# Allegro board ASIX_REV5.brd
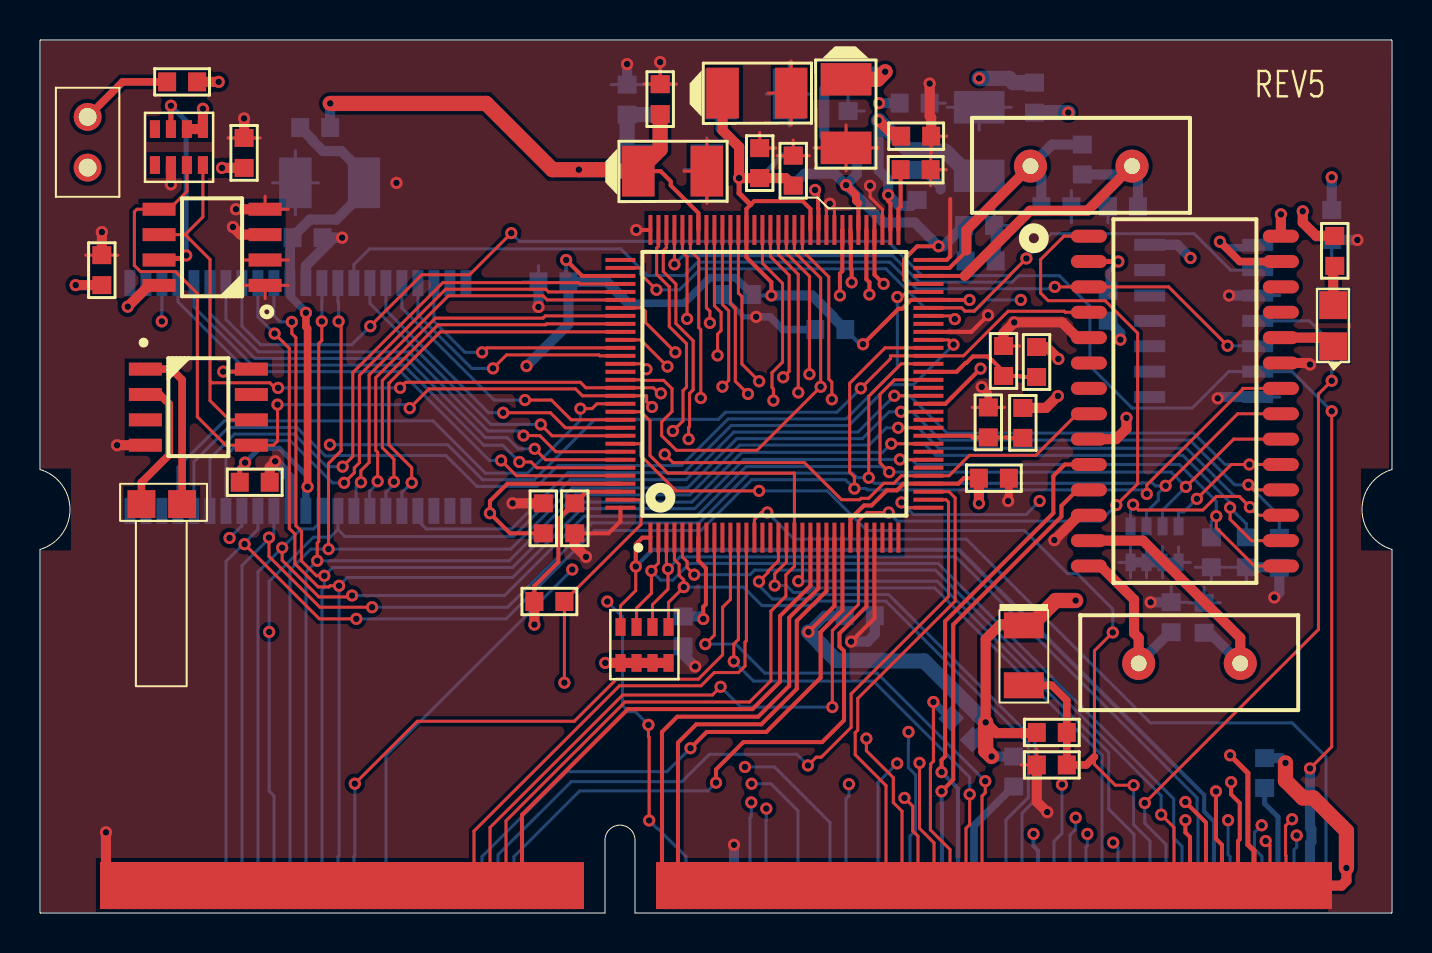
[diagram p0: board, top side]
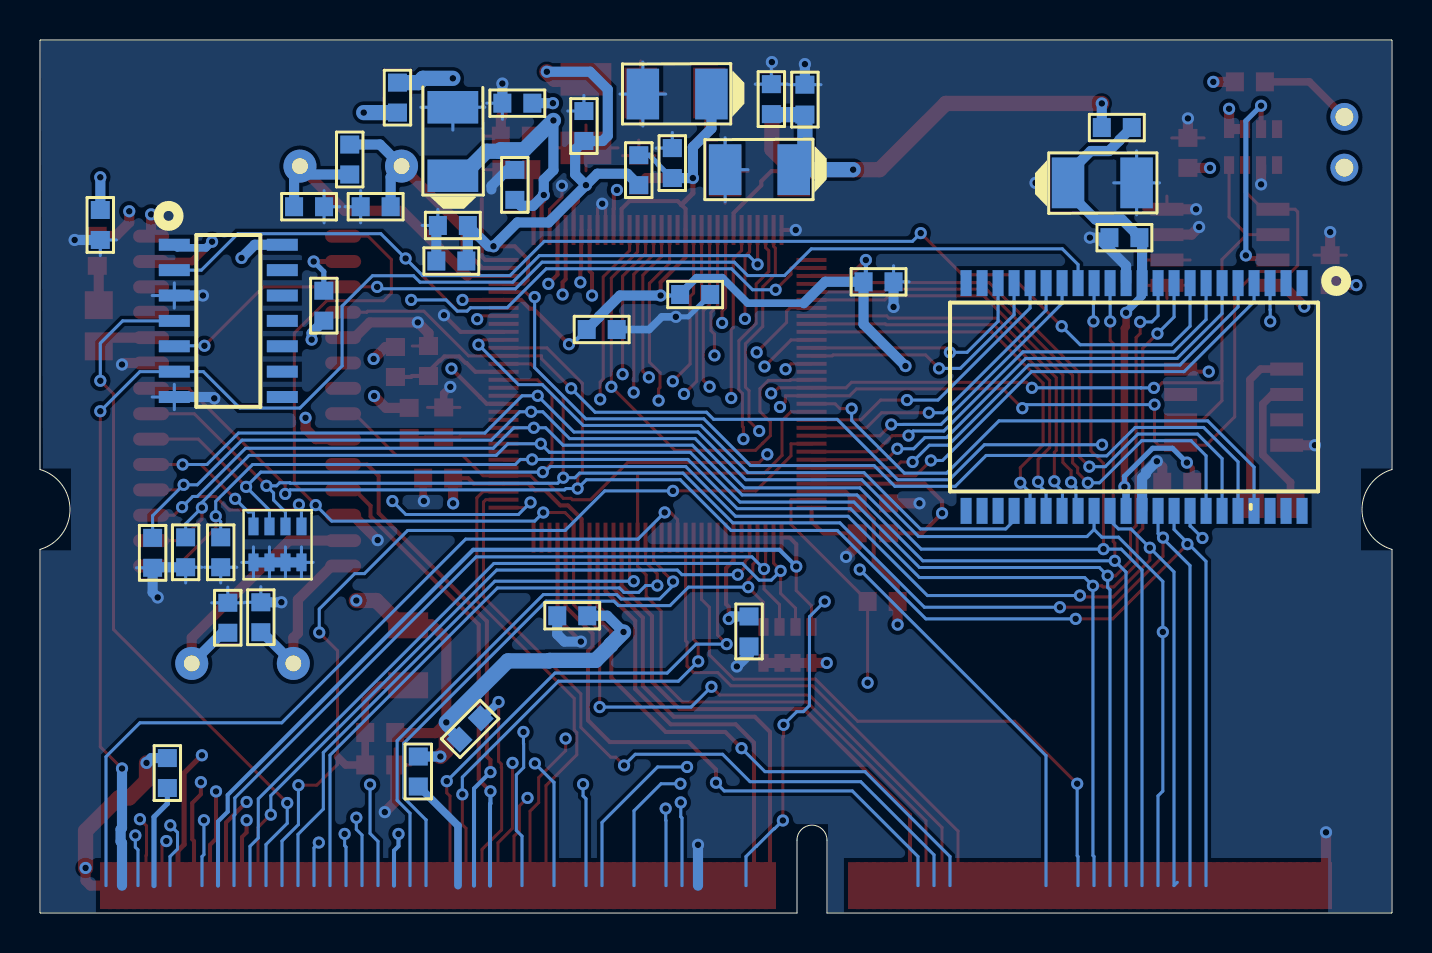
[diagram p1: board, bottom side, seen from below]

Outline 67.6 x 43.7 mm; copper layers: TOP, GND, POWER, BOTTOM. Coordinates in mm from the lower left corner of the outline.
Outline path: 0,43.67 0.03,43.7 67.57,43.7 67.6,43.67 67.6,22.2 arc(66.1,20.2) 67.6,18.2 67.6,0.03 67.57,0 29.75,0 29.75,3.65 arc(29,4.4) 28.25,3.65 28.25,0 0.03,0 0,0.03 0,18.2 arc(1.5,20.2) 0,22.2 0,43.67

## Design rules (mm)
net group CRYSTAL: nets 25MXTLN 25MXTLP
net group ETHERNET1: nets TXON TXOP
net group ETHERNET2: nets RXIN RXIP
net group USB_D: nets USB_D+ USB_D-
net group XDATA_BUS: nets XDATA0 XDATA1 XDATA2 XDATA3 XDATA4 XDATA5 XDATA6 XDATA7

## Placement (name value [footprint] x y rotation side)
C1  0.1UF_50V  [CAPC1608X55N_0603]  35.98 37.54 270 top
C2  10V 10UF  [SM_TANT]  37.46 40.99 180 bottom
C3  10V 10UF  [SM_TANT]  33.34 37.21 180 bottom
C4  0.1UF_50V  [CAPC1608X55N_0603]  31.03 40.74 270 bottom
C5  0.1UF_50V  [CAPC1608X55N_0603]  40.99 14.88 0 bottom
C6  0.1UF_50V  [CAPC1608X55N_0603]  35.98 37.54 90 bottom
C7  0.1UF_50V  [CAPC1608X55N_0603]  26.74 19.76 90 top
C8  10V 10UF  [SM_TANT]  33.34 37.13 180 top
C9  0.1UF_50V  [CAPC1608X55N_0603]  43.81 38.88 180 top
C10  10V 10UF  [SM_TANT]  46.96 40.33 270 bottom
C11  0.1UF_50V  [CAPC1608X55N_0603]  47.03 32.64 0 bottom
C12  0.1UF_50V  [CAPC1608X55N_0603]  32.15 14.09 90 bottom
C13  0.1UF_50V  [CAPC1608X55N_0603]  46.96 34.41 180 bottom
C14  10V 10UF  [SM_TANT]  40.3 38.3 90 top
C15  33pF  [CAPC1608X55N_0603]  54.15 35.35 0 bottom
C16  0.1UF_50V  [CAPC1608X55N_0603]  43.86 36.45 90 bottom
C17  10V 10UF  [SM_TANT]  37.56 41.04 180 top
C18  0.1UF_50V  [CAPC1608X55N_0603]  10.2 38.05 270 top
C19  0.1UF_50V  [CAPC1608X55N_0603]  47.69 21.76 0 top
C20  33pF  [CAPC1608X55N_0603]  50.82 35.35 180 bottom
C21  0.1UF_50V  [CAPC1608X55N_0603]  40.4 39.39 270 bottom
C22  0.1UF_50V  [CAPC1608X55N_0603]  37.66 37.16 270 top
C23  0.1UF_50V  [CAPC1608X55N_0603]  31.01 40.74 270 top
C24  1UF_50V  [CAPC1608X55N_0603]  50.59 7.41 0 top
C25  0.1UF_50V  [CAPC1608X55N_0603]  25.67 31.59 180 bottom
C26  0.1UF_50V  [CAPC1608X55N_0603]  3.09 32.18 90 top
C27  0.1UF_50V  [CAPC1608X55N_0603]  34.84 30.96 0 bottom
C28  0.1UF_50V  [CAPC1608X55N_0603]  29.36 40.71 90 bottom
C29  0.1UF_50V  [CAPC1608X55N_0603]  39.52 29.21 180 bottom
C30  0.1UF_50V  [CAPC1608X55N_0603]  25.16 19.76 90 top
C31  0.1UF_50V  [CAPC1608X55N_0603]  10.74 21.56 0 top
C32  0.1UF_50V  [CAPC1608X55N_0603]  13.38 33.8 180 bottom
C33  10V 10UF  [SM_TANT]  12.77 36.55 0 bottom
C34  0.1UF_50V  [CAPC1608X55N_0603]  64.59 34.44 270 bottom
C35  0.1UF_50V  [CAPC1608X55N_0603]  53.41 30.4 270 bottom
C36  15pF  [CAPC1608X55N_0603]  56.56 14.8 90 bottom
C37  15pF  [CAPC1608X55N_0603]  58.21 14.78 90 bottom
C38  0.1UF_50V  [CAPC1608X55N_0603]  43.73 40.54 0 bottom
D1  1N4148  [CAPC3216X130AN_1206]  49.19 12.9 90 top
D2  WHITE  [LED_SMT]  64.66 30.43 90 top
J1  -  [CON2]  2.38 38.58 90 top
L1  0.3A 10R  [CAPC1608X55N_0603]  49.73 40.81 90 bottom
L2  0.3A 10R  [CAPC1608X55N_0603]  37.66 37.18 270 bottom
L3  0.3A 10R  [CAPC1608X55N_0603]  13.76 39.32 0 bottom
R1  1M_5%  [CAPC1608X55N_0603]  52.11 37.72 270 bottom
R2  12.1K-1%  [CAPC1608X55N_0603]  43.78 37.21 0 top
R3  RPACK4_10K-1%  [SM_R_1608_NET4]  8.15 39.24 270 top
R4  10k  [CAPC1608X55N_0603]  46.09 9.22 135 bottom
R5  100K_5%  [CAPC1608X55N_0603]  50.59 9.04 0 top
R6  10K  [CAPC1608X55N_0603]  61.23 7.01 90 bottom
R7  10K  [CAPC1608X55N_0603]  48.68 7.08 90 bottom
R8  RPACK_4.7K  [SM_R_1608_NET4]  29.03 12.52 90 top
R9  4.7K_5%  [CAPC1608X55N_0603]  49.14 24.53 90 top
R10  4.7K_5%  [CAPC1608X55N_0603]  49.83 27.58 90 top
R11  4.7K_5%  [CAPC1608X55N_0603]  48.18 27.63 90 top
R12  4.7K_5%  [CAPC1608X55N_0603]  47.41 24.56 90 top
R13  4.7K_5%  [CAPC1608X55N_0603]  60.32 18.06 270 bottom
R14  4.7K_5%  [CAPC1608X55N_0603]  58.57 18.06 270 bottom
R15  RPACK_4.7K  [SM_R_1608_NET4]  54.53 19.35 270 bottom
R16  4.7K_5%  [CAPC1608X55N_0603]  61.97 18.03 270 bottom
R17  4.7K_5%  [CAPC1608X55N_0603]  7.11 41.6 0 top
R18  200  [CAPC1608X55N_0603]  64.74 33.14 90 top
R19  10k_1%  [CAPC1608X55N_0603]  25.47 15.59 0 top
U1  SN74HC02  [SOIC127P600X145-14N]  58.18 29.64 180 bottom
U2  AX11015  [QFP40P1600X1600X160-128N]  36.72 26.49 90 top
U3  AT24C02N/SO8  [SOIC127P594X363-8N]  8.6 33.32 180 top
U4  8563T  [SOIC127P594X363-8N]  7.92 25.32 0 top
U5  IS61LV5128AL  [SOP80P1176X120-44N]  12.9 25.83 270 bottom
U6  CH375B  [SOIC127P1047X264-28N]  57.24 25.63 0 top
U7  CON144  [DIMM_144]  29 0.2 0 top
X1  OSC 12 MHz  [XTAL1]  54.93 12.49 180 top
Y1  25M  [XTAL1]  49.52 37.39 180 top
Y2  32.768KHZ  [XTAL_32768]  7.11 20.47 180 top

## Library data of the parts
C1 C4-C7 C9 C11-C13 C15 C16 C18-C32 C34-C38 = C
C2 C3 C8 C10 C14 C17 C33 = CAP
D1 = D1N4001_1
D2 = LED
J1 = CON2
L1-L3 = INDUCTOR
R1 R2 R9-R14 R16 R17 = R_0
R3 = R_1
R4 R5 R19 = R_2
R6 R7 R18 = R
R8 R15 = RESISTOR DIP 4_1
U1 = SN7402_0
U2 = AT89C52/LCC_23
U3 = AT24C02N/SO8_0
U4 = 8563T_0
U5 = HM628128BLT_3
U6 = FT232BM_1
U7 = CON144
X1 = Oscillator_0
Y1 Y2 = CRYSTAL

## Footprints (pads in the part's own frame, mm; a bottom-side part is the same pattern mirrored in y, then rotated)
CAPC1608X55N_0603
  rect 0.9x0.95 smd: 1(-0.75,0) 2(0.75,0)
CAPC3216X130AN_1206
  rect 1.3x2 smd: 1(-1.5,0) 2(1.5,0)
CON2
  round 1.397 hole 0.889: 1(-1.27,0) 2(1.27,0)
DIMM_144
  rect 0.6x2.35 smd: A1(-25.7,1.175) A2(-24.9,1.175) A3(-24.1,1.175) A4(-23.3,1.175) A5(-22.5,1.175) A6(-21.7,1.175) A7(-20.9,1.175) A8(-20.1,1.175) A9(-19.3,1.175) A10(-18.5,1.175) A11(-17.7,1.175) A12(-16.9,1.175) A13(-16.1,1.175) A14(-15.3,1.175) A15(-14.5,1.175) A16(-13.7,1.175) A17(-12.9,1.175) A18(-12.1,1.175) A19(-11.3,1.175) A20(-10.5,1.175) A21(-9.7,1.175) A22(-8.9,1.175) A23(-8.1,1.175) A24(-7.3,1.175) A25(-6.5,1.175) A26(-5.7,1.175) A27(-4.9,1.175) A28(-4.1,1.175) A29(-3.3,1.175) A30(-2.5,1.175) A31(2.1,1.175) A32(2.9,1.175) A33(3.7,1.175) A34(4.5,1.175) A35(5.3,1.175) A36(6.1,1.175) A37(6.9,1.175) A38(7.7,1.175) A39(8.5,1.175) A40(9.3,1.175) A41(10.1,1.175) A42(10.9,1.175) A43(11.7,1.175) A44(12.5,1.175) A45(13.3,1.175) A46(14.1,1.175) A47(14.9,1.175) A48(15.7,1.175) A49(16.5,1.175) A50(17.3,1.175) A51(18.1,1.175) A52(18.9,1.175) A53(19.7,1.175) A54(20.5,1.175) A55(21.3,1.175) A56(22.1,1.175) A57(22.9,1.175) A58(23.7,1.175) A59(24.5,1.175) A60(25.3,1.175) A61(26.1,1.175) A62(26.9,1.175) A63(27.7,1.175) A64(28.5,1.175) A65(29.3,1.175) A66(30.1,1.175) A67(30.9,1.175) A68(31.7,1.175) A69(32.5,1.175) A70(33.3,1.175) A71(34.1,1.175) A72(34.9,1.175) B1(-25.3,1.175) B2(-24.5,1.175) B3(-23.7,1.175) B4(-22.9,1.175) B5(-22.1,1.175) B6(-21.3,1.175) B7(-20.5,1.175) B8(-19.7,1.175) B9(-18.9,1.175) B10(-18.1,1.175) B11(-17.3,1.175) B12(-16.5,1.175) B13(-15.7,1.175) B14(-14.9,1.175) B15(-14.1,1.175) B16(-13.3,1.175) B17(-12.5,1.175) B18(-11.7,1.175) B19(-10.9,1.175) B20(-10.1,1.175) B21(-9.3,1.175) B22(-8.5,1.175) B23(-7.7,1.175) B24(-6.9,1.175) B25(-6.1,1.175) B26(-5.3,1.175) B27(-4.5,1.175) B28(-3.7,1.175) B29(-2.9,1.175) B30(-2.1,1.175) B31(2.5,1.175) B32(3.3,1.175) B33(4.1,1.175) B34(4.9,1.175) B35(5.7,1.175) B36(6.5,1.175) B37(7.3,1.175) B38(8.1,1.175) B39(8.9,1.175) B40(9.7,1.175) B41(10.5,1.175) B42(11.3,1.175) B43(12.1,1.175) B44(12.9,1.175) B45(13.7,1.175) B46(14.5,1.175) B47(15.3,1.175) B48(16.1,1.175) B49(16.9,1.175) B50(17.7,1.175) B51(18.5,1.175) B52(19.3,1.175) B53(20.1,1.175) B54(20.9,1.175) B55(21.7,1.175) B56(22.5,1.175) B57(23.3,1.175) B58(24.1,1.175) B59(24.9,1.175) B60(25.7,1.175) B61(26.5,1.175) B62(27.3,1.175) B63(28.1,1.175) B64(28.9,1.175) B65(29.7,1.175) B66(30.5,1.175) B67(31.3,1.175) B68(32.1,1.175) B69(32.9,1.175) B70(33.7,1.175) B71(34.5,1.175) B72(35.3,1.175)
LED_SMT
  rect 1.397x1.397 smd: 1(0,0) 2(-2.06,0)
QFP40P1600X1600X160-128N
  rect 1.5x0.2 smd: 1(-7.7,6.2) 2(-7.7,5.8) 3(-7.7,5.4) 4(-7.7,5) 5(-7.7,4.6) 6(-7.7,4.2) 7(-7.7,3.8) 8(-7.7,3.4) 9(-7.7,3) 10(-7.7,2.6) 11(-7.7,2.2) 12(-7.7,1.8) 13(-7.7,1.4) 14(-7.7,1) 15(-7.7,0.6) 16(-7.7,0.2) 17(-7.7,-0.2) 18(-7.7,-0.6) 19(-7.7,-1) 20(-7.7,-1.4) 21(-7.7,-1.8) 22(-7.7,-2.2) 23(-7.7,-2.6) 24(-7.7,-3) 25(-7.7,-3.4) 26(-7.7,-3.8) 27(-7.7,-4.2) 28(-7.7,-4.6) 29(-7.7,-5) 30(-7.7,-5.4) 31(-7.7,-5.8) 32(-7.7,-6.2) 65(7.7,-6.2) 66(7.7,-5.8) 67(7.7,-5.4) 68(7.7,-5) 69(7.7,-4.6) 70(7.7,-4.2) 71(7.7,-3.8) 72(7.7,-3.4) 73(7.7,-3) 74(7.7,-2.6) 75(7.7,-2.2) 76(7.7,-1.8) 77(7.7,-1.4) 78(7.7,-1) 79(7.7,-0.6) 80(7.7,-0.2) 81(7.7,0.2) 82(7.7,0.6) 83(7.7,1) 84(7.7,1.4) 85(7.7,1.8) 86(7.7,2.2) 87(7.7,2.6) 88(7.7,3) 89(7.7,3.4) 90(7.7,3.8) 91(7.7,4.2) 92(7.7,4.6) 93(7.7,5) 94(7.7,5.4) 95(7.7,5.8) 96(7.7,6.2)
  rect 0.2x1.5 smd: 33(-6.2,-7.7) 34(-5.8,-7.7) 35(-5.4,-7.7) 36(-5,-7.7) 37(-4.6,-7.7) 38(-4.2,-7.7) 39(-3.8,-7.7) 40(-3.4,-7.7) 41(-3,-7.7) 42(-2.6,-7.7) 43(-2.2,-7.7) 44(-1.8,-7.7) 45(-1.4,-7.7) 46(-1,-7.7) 47(-0.6,-7.7) 48(-0.2,-7.7) 49(0.2,-7.7) 50(0.6,-7.7) 51(1,-7.7) 52(1.4,-7.7) 53(1.8,-7.7) 54(2.2,-7.7) 55(2.6,-7.7) 56(3,-7.7) 57(3.4,-7.7) 58(3.8,-7.7) 59(4.2,-7.7) 60(4.6,-7.7) 61(5,-7.7) 62(5.4,-7.7) 63(5.8,-7.7) 64(6.2,-7.7) 97(6.2,7.7) 98(5.8,7.7) 99(5.4,7.7) 100(5,7.7) 101(4.6,7.7) 102(4.2,7.7) 103(3.8,7.7) 104(3.4,7.7) 105(3,7.7) 106(2.6,7.7) 107(2.2,7.7) 108(1.8,7.7) 109(1.4,7.7) 110(1,7.7) 111(0.6,7.7) 112(0.2,7.7) 113(-0.2,7.7) 114(-0.6,7.7) 115(-1,7.7) 116(-1.4,7.7) 117(-1.8,7.7) 118(-2.2,7.7) 119(-2.6,7.7) 120(-3,7.7) 121(-3.4,7.7) 122(-3.8,7.7) 123(-4.2,7.7) 124(-4.6,7.7) 125(-5,7.7) 126(-5.4,7.7) 127(-5.8,7.7) 128(-6.2,7.7)
SM_R_1608_NET4
  rect 0.889x0.508 smd: 1(0,0) 2(1.8,0) 3(0,-0.8) 4(1.8,-0.8) 5(0,-1.6) 6(1.8,-1.6) 7(0,-2.4) 8(1.8,-2.4)
SM_TANT
  rect 1.626x2.54 smd: 1(3.43,0) 2(0,0)
SOIC127P594X363-8N
  rect 1.65x0.65 smd: 1(-2.65,1.905) 2(-2.65,0.635) 3(-2.65,-0.635) 4(-2.65,-1.905) 5(2.65,-1.905) 6(2.65,-0.635) 7(2.65,0.635) 8(2.65,1.905)
SOIC127P600X145-14N
  rect 1.55x0.6 smd: 1(-2.7,3.81) 2(-2.7,2.54) 3(-2.7,1.27) 4(-2.7,0) 5(-2.7,-1.27) 6(-2.7,-2.54) 7(-2.7,-3.81) 8(2.7,-3.81) 9(2.7,-2.54) 10(2.7,-1.27) 11(2.7,0) 12(2.7,1.27) 13(2.7,2.54) 14(2.7,3.81)
SOIC127P1047X264-28N
  oval 1.8x0.65 smd: 1(-4.8,8.255) 2(-4.8,6.985) 3(-4.8,5.715) 4(-4.8,4.445) 5(-4.8,3.175) 6(-4.8,1.905) 7(-4.8,0.635) 8(-4.8,-0.635) 9(-4.8,-1.905) 10(-4.8,-3.175) 11(-4.8,-4.445) 12(-4.8,-5.715) 13(-4.8,-6.985) 14(-4.8,-8.255) 15(4.8,-8.255) 16(4.8,-6.985) 17(4.8,-5.715) 18(4.8,-4.445) 19(4.8,-3.175) 20(4.8,-1.905) 21(4.8,-0.635) 22(4.8,0.635) 23(4.8,1.905) 24(4.8,3.175) 25(4.8,4.445) 26(4.8,5.715) 27(4.8,6.985) 28(4.8,8.255)
SOP80P1176X120-44N
  rect 1.3x0.55 smd: 1(-5.7,8.4) 2(-5.7,7.6) 3(-5.7,6.8) 4(-5.7,6) 5(-5.7,5.2) 6(-5.7,4.4) 7(-5.7,3.6) 8(-5.7,2.8) 9(-5.7,2) 10(-5.7,1.2) 11(-5.7,0.4) 12(-5.7,-0.4) 13(-5.7,-1.2) 14(-5.7,-2) 15(-5.7,-2.8) 16(-5.7,-3.6) 17(-5.7,-4.4) 18(-5.7,-5.2) 19(-5.7,-6) 20(-5.7,-6.8) 21(-5.7,-7.6) 22(-5.7,-8.4) 23(5.7,-8.4) 24(5.7,-7.6) 25(5.7,-6.8) 26(5.7,-6) 27(5.7,-5.2) 28(5.7,-4.4) 29(5.7,-3.6) 30(5.7,-2.8) 31(5.7,-2) 32(5.7,-1.2) 33(5.7,-0.4) 34(5.7,0.4) 35(5.7,1.2) 36(5.7,2) 37(5.7,2.8) 38(5.7,3.6) 39(5.7,4.4) 40(5.7,5.2) 41(5.7,6) 42(5.7,6.8) 43(5.7,7.6) 44(5.7,8.4)
XTAL1
  round 1.651 hole 0.787: 1(-5.08,0) 2(0,0)
XTAL_32768
  rect 1.397x1.397 smd: 1(0,0) 2(2.032,0)

## Nets
3VREF: U7.B45
GND: C1.1 C2.2 C3.2 C4.1 C5.2 C6.2 C7.1 C8.2 C9.1 C10.2 C11.2 C12.1 C13.1 C14.2 C15.1 C16.2 C17.2 C18.1 C19.2 C20.1 C21.1 C22.1 C23.1 C24.1 C25.2 C26.2 C27.1 C28.2 C29.2 C30.2 C31.2 C32.1 C33.2 C34.2 C36.2 C37.2 C38.2 R2.2 R3.6(2) R11.2 R12.2 R13.2 R14.2 R15.2 R15.4 R15.6 R15.8 R16.2 U1.3(I1) U1.7(GND) U2.29(GND_29) U2.55(GND_54) U2.64(GND18A_64) U2.67(GND3A) U2.73(GND18A) U2.74(GND3R) U2.96(GND_96) U2.128(GND_128) U3.1(A0) U3.2(A1) U3.3(A2) U3.4(GND) U4.4(GND) U5.12(GND_12) U5.34(GND_34) U6.5(TXD) U6.12(GND_12) U6.23(GND) U7.A1 U7.B35
VDD18: C1.2 C2.1 C6.1 C12.2 C17.1 C19.1 C22.2 C25.1 C27.2 C29.1 C30.1 L2.1 U2.7(VCCK_7) U2.26(VCCK_26) U2.36(VCCK_36) U2.59(VCCK_59) U2.76(VCC18_76) U2.84(VCCK_84) U2.99(VCCK) U2.125(VCCK_125)
VDD18A: C11.1 C13.2 C14.1 C21.2 L2.2 U2.61(VCC18A_61) U2.70(VCC18A_70)
VDD33: C3.1 C4.2 C5.1 C7.2 C8.1 C18.2 C23.2 C26.1 C28.1 C34.1 C35.2 C38.1 D1.2 L1.1 L3.2 R3.1 R3.3(1) R4.1 R5.1 R6.2 R7.2 R8.1 R8.3 R8.5 R8.7 R9.2 R10.2 R17.2 R18.2 R19.1 U1.14(VCC) U2.24(VCCIO_24) U2.46(VCCIO) U2.57(VCCIO_57) U2.75(VCC3R) U2.90(VCCIO_90) U2.126(VCCIO_126) U3.8(VCC) U6.9(V3) U6.28(VCC) U7.A71 U7.A72
VDD33A: C9.2 C10.1 C16.1 L1.2 U2.66(VCC3A_66) U7.A68
25MXTLN: C15.2 R1.2 U2.62(XTL25N) Y1.1
25MXTLP: C20.2 R1.1 U2.63(XTL25P) Y1.2
2003_ENABLE: U2.5(P20/LDA0/RX_CLK) U7.A63
AI5: U7.A61
AI7: U7.A62
AIN0: U7.A58
AIN1: U7.A57
AIN2: U7.A59
AIN3: U7.A60
CHSEL0: R4.2 U2.78(P30/LDA8/TX_CLK) U2.112(EXT_WKUP/INT0) U7.A49
CHSEL1: U2.80(P31/LDA9/MTXD0) U7.A48
CHSEL2: U2.82(P32_LDA10/MTXD1) U7.A47
CHSEL3: U2.86(P33/LDA11/MTXD2) U7.A46
DALI_READ: U2.19(P25/LDA5/RX_DV) U2.116(INT1/LINT) U7.A26
DALI_WRITE: U2.21(P26/LDA6/CRS) U7.A27
DN0: U7.A55
DP0: U7.B47
EXT_DATA_RD#: U2.52(XDATRD_N) U5.37(O\E\) U6.4(RD#)
EXT_DATA_WR#: U1.5(I0) U2.33(XDATWR_N) U5.15(W\E\) U6.3(WR#)
EXT_RAM_CE0#: U1.2(I0) U2.58(XADDR19/WR_DRQ) U5.8(CE#)
GP1: U2.95(P17/LA17) U7.B18
GP2: U2.94(P16/LA6) U7.B32
GP3: U2.91(P15/LA5) U7.B36
GP4: U2.87(P14/LA4) U7.B37
GP5: U2.85(P13/LA3/RE_N) U7.B42
GP6: U2.81(P12/LA2/DE) U7.B44
GP7: U2.79(P11/LA1.MDIO) U7.B46
GP8: U2.77(P10/LA0/MDC) U7.B55
GP9: U2.88(P34/LDA12/MTXD3) U7.B59
GP10: U2.89(P35/LDA13/TX_EN) U7.B66
GP11: U2.92(P36/LDA14/TX_ER) U7.B68
GP12: U1.6(I1) U2.93(P37/LDA15/COL) U7.B71
GP13: U2.14(P23/LDA3/MRXD2) U7.B72
GP15: U2.9(P21/LDA1/MRXD0) U7.A51
GP16: U2.12(P22/LDA2/MRXD1) U7.A50
GP23: U2.27(P27/LDA7/RX_ER) U6.1(INT#) U7.A25
GP24: U2.17(P24/LDA4/MRXD3) U7.B53
H_I2C_CLOCK: R3.2 U2.113(SCL) U3.6(SCLK) U4.6(SCL) U7.B39
H_I2C_DATA: R3.4(2) U2.114(SDA) U3.5(SDA) U4.5(SDA) U7.B41
INT: U4.3(INT)
IRQ_LAN: U7.A52
KEYPAD_3: U2.22(P02/LA10/CTS) U7.A31
LCD_PWREN: U7.B38
LE: U1.4(O) U7.B62
NDIS_OFF: U7.B40
NGCS3: U7.B67
NRESET: C24.2 D1.1 R5.2 U2.120(RST_N) U7.B61
NTRST: U7.B19
NXPON: U7.A54
NYPON: U7.B51
OM0: U7.A56
PORT0_3: U2.23(P03/LA11/DSR) U7.A32
PORT0_4: U2.25(P04/LA12/RI) U7.B24
PORT0_5: U2.28(P05/LA13/DCD) U7.B26
PORT0_6: U2.34(P06/LA14/RTS) U7.B25
PORT0_7: U2.35(P07/LA15/DTR) U7.A45
PWM1: U2.11(TM1_CK/LRD_N/CEX1) U7.B16
PWM2: U2.13(TM1_GT/LRDY/CEX2) U7.A24
RTCVCC: U4.8(VDD) U7.B54
RXIN: U2.69(RXIN) U7.A66
RXIP: U2.68(RXIP) U7.A67
SPI_CLK: R8.2 U2.1(SCLK) U7.B65
SPI_DAT1: R7.1 U7.B50
SPI_DAT2: R6.1 U7.B69
SPI_MISO: R8.6 U2.3(MISO) U7.B64
SPI_MOSI: R8.4 U2.2(MOSI) U7.B63
SPI_SS0: R19.2 U2.127(SS0) U7.B70
SPI_SS1: R8.8 U2.4(SS1/DQ) U7.B52
SYS_CLK_SEL0: R9.1 R12.1 U2.42(SYSCK_SEL0)
SYS_CLK_SEL1: R10.1 R11.1 U2.50(SYSCK_SEL1)
TCK: U7.B22
TDI: U7.A28
TDO: U7.B20
TMS: U7.B21
TXON: U2.72(TXON) U7.A64
TXOP: U2.71(TXOP) U7.A65
UART0_RXD: U2.98(RXD0) U7.A70
UART0_TXD: U2.103(TXD0) U7.B57
UART1_RXD: U2.107(RXD1/CS0_N/ECI) U7.B56
UART1_TXD: U2.110(TXD1/LCS1_N/CEX0) U7.A69
UART2_RXD: U2.18(P00/LA8/RXD2) U7.B58
UART2_TXD: U2.20(P01/LA9/TXD2) U7.B60
USB_A0: U2.37(XADDR0) U5.3(A0) U6.8(A0)
USB_CS: U1.1(O) U6.27(CS#)
USB_D+: U6.10(UD+) U7.B49
USB_D-: U6.11(UD-) U7.B48
USB_LED: D2.2(CATHODE) U6.24(ACT#)
USB_RESET#: U6.26(RST#)
USB_RSTI: C35.1 U6.2(RSTI)
USB_XI: C37.1 U6.13(XI) X1.1(OUT)
USB_XO: C36.1 U6.14(XO) X1.2(V+)
VCLK: U7.A29
VD5: U7.A33
VD6: U7.A34
VD7: U7.B28
VD8: U7.A35
VD9: U7.B27
VD10: U7.A36
VD11: U7.B30
VD12: U7.A37
VD13: U7.A39
VD14: U7.A38
VD15: U7.A40
VD16: U7.A41
VD17: U7.B33
VD18: U7.B34
VD19: U7.A42
VD20: U7.A43
VD21: U7.A44
VD23: U7.B29
VFRAME: U7.B23
VLINE: U7.B31
VM: U7.A30
XADDR1: U2.124(XADDR1) U5.4(A1)
XADDR2: U2.123(XADDR2) U5.5(A2)
XADDR3: U2.122(XADDR3) U5.6(A3)
XADDR4: U2.121(XADDR4) U5.7(A4)
XADDR5: U2.119(XADDR5) U5.16(A5)
XADDR6: U2.118(XADDR6) U5.17(A6)
XADDR7: U2.117(XADDR7) U5.18(A7)
XADDR8: U2.109(XADDR8) U5.19(A8)
XADDR9: U2.108(XADDR9) U5.20(A9)
XADDR10: U2.54(XADDR10) U5.26(A10)
XADDR11: U2.106(XADDR11) U5.27(A11)
XADDR12: U2.105(XADDR12) U5.28(A12)
XADDR13: U2.104(XADDR13) U5.29(A13)
XADDR14: U2.102(XADDR14) U5.30(A14)
XADDR15: U2.101(XADDR15) U5.38(A15)
XADDR16: U2.100(XADDR16) U5.39(A16)
XADDR17: U2.60(XADDR17) U5.40(A17)
XADDR18: U2.115(XADDR18) U5.41(A18)
XDATA0: R14.1 U2.39(XDATA0) U5.9(D0) U6.15(D0) U7.B15
XDATA1: R13.1 U2.41(XDATA1) U5.10(D1) U6.16(D1) U7.B14
XDATA2: R15.1 U2.43(XDATA2) U5.13(D2) U6.17(D2) U7.B13
XDATA3: R16.1 U2.45(XDATA3) U5.14(D3) U6.18(D3) U7.B12
XDATA4: J1.1 R15.7 U2.47(XDATA4) U5.31(D4) U6.19(D4) U7.B11
XDATA5: R15.5 U2.49(XDATA5) U5.32(D5) U6.20(D5) U7.B10
XDATA6: R15.3 U2.51(XDATA6) U5.35(D6) U6.21(D6) U7.B9
XDATA7: U2.53(XDATA7) U5.36(D7) U6.22(D7) U7.B8
XMON: U7.B43
YMON: U7.A53
N2907310: R3.5(1) U3.7(WP)
N2954595: U4.2(X2) Y2.2
N2954598: U4.1(X1) Y2.1
N4474386: C31.1 C32.2 C33.1 L3.1 U5.11(VCC_11) U5.33(VCC_33)
N5776862: R2.1 U2.65(RSET_BG)
N17423067: U7.B17
N19834913: D2.1(ANODE) R18.1
N21028231: J1.2 R17.1

Pads without a net: R3 7 8; U1 8 9 10 11 12 13; U2 6 8 10 15 16 30 31 32 38 40 44 48 56 83 97 111; U4 7; U5 1 2 21 22 23 24 25 42 43 44; U6 6 7 25; U7 A2 A3 A4 A5 A6 A7 A8 A9 A10 A11 A12 A13 A14 A15 A16 A17 A18 A19 A20 A21 A22 A23 B1 B2 B3 B4 B5 B6 B7

## Via types
v1: diameter 0.61, hole 0.33, TOP to BOTTOM, 242 vias

## Routing (per net, layer and track width the routed paths; a pad name or vN(x,y) marks a point on that pad's centre or on a via; arc(x,y) is an arc through that point)
GND: length 189.4
  TOP w0.152: 36.79,38.29 C1.1 35.98,39.07 ; 12.41,32.69 U3.2 10.1,32.69 ; C23.1 31.81,41.49 ; C23.1 30.2,41.49 ; C23.1 31.01,42.27 ; 3.9,32.93 C26.2 2.29,32.93 ; 32.2,37.13 C8.2 ; C8.2 33.34,35.53 ; C8.2 33.34,38.73 ; 9.4,38.8 C18.1 11.01,38.8 ; 12.41,35.23 U3.4 11.25,35.88 ; v1(41.5,36.4) 41.5,35.84 42.12,35.22 U2.67 ; 36.86,37.91 C22.1 ; C22.1 37.66,38.69 ; C22.1 38.47,37.91 ; 11.25,30.76 U3.1 ; U3.1 10.1,31.42 ; U3.1 12.41,31.42 ; 40.3,37.16 C14.2 ; C14.2 38.7,38.3 ; C14.2 40.3,39.44 ; C14.2 41.9,38.3 ; 36.42,41.04 C17.2 ; C17.2 37.56,42.64 ; C17.2 37.56,39.44 ; 45.34,38.88 C9.1 44.56,38.08 ; U2.74 39.32,35.33 v1(39.49,35.5) 39.72,35.27 U2.73 ; R2.2 44.53,38.01 ; R2.2 45.31,37.21 ; R2.2 44.53,36.4 ; 46.61,25.31 R12.2 48.22,25.31 ; 48.18,29.16 R11.2 48.98,28.38 ; 49.06,7.41 C24.1 49.84,8.22
  TOP w0.203: v1(47.4,29.92) 46.57,29.09 U2.55 ; U2.128 29.02,19.6 28.43,19.01 C7.1 ; v1(40.56,13.59) 41.72,14.75 U2.29 ; U2.96 v1(29.81,34.19) ; 45.51,35.73 45.51,32.86 45.34,32.69 U2.64
  TOP w0.381: C19.2 48.44,20.9 48.41,20.86 v1(48.41,20.62) ; v1(47.08,26.34) 47.41,26.01 R12.2
  TOP w0.508: U3.3 10.03,33.96 v1(9.65,34.34) ; U3.4 v1(9.8,35.23) ; U6.23 63.43,27.53 v1(63.5,27.45) ; v1(50.36,5.05) 49.84,5.57 C24.1 ; U7.A1 v1(3.3,4.04) ; v1(44.48,41.52) 44.48,39.89 44.56,39.82 C9.1 ; R3.6 v1(6.55,36.47) ; C31.2 11.49,22.32 11.75,22.59 11.75,22.61 v1(11.76,22.61) ; R11.2 48.17,28.39 48.17,29.02 v1(48.71,29.56) 51.11,29.56 51.87,28.8 U6.5 ; C30.2 v1(23.63,20.51) ; C7.1 26.74,18.39 v1(27.3,17.83) ; C26.2 v1(3.09,34.08) ; v1(50.72,18.67) 51.96,19.91 U6.12 ; C18.1 v1(10.2,39.77) ; U4.4 v1(3.85,23.42)
  BOTTOM w0.152: 57.76,17.31 R14.2 ; R14.2 59.37,17.31 ; R14.2 58.57,16.53 ; 12.77,34.95 C33.2 ; C33.2 13.91,36.55 ; C33.2 11.63,36.55 ; C33.2 12.77,38.15 ; 30.16,41.46 C28.2 28.55,41.46 ; 54.53,16.78 R15.2 ; R15.2 53.94,17.55 ; R15.2 54.53,18.33 ; 51.57,34.55 C20.1 ; C20.1 52.35,35.35 ; C20.1 51.57,36.16 ; 41.21,40.14 C21.1 40.4,40.92 ; 60.88,25.2 U1.7 ; U1.7 61.99,25.83 ; U1.7 60.88,26.46 ; R15.8 56.93,18.33 ; R15.8 56.93,16.78 ; R15.8 57.51,17.55 ; U1.3 60.88,31.54 ; U1.3 60.88,30.28 ; U1.3 61.99,30.91 ; 53.4,34.55 C15.1 ; C15.1 53.4,36.16 ; C15.1 52.62,35.35 ; C13.1 47.71,35.22 ; C13.1 47.71,33.61 ; C13.1 48.49,34.41 ; 45.36,40.33 C10.2 ; C10.2 46.96,39.19 ; C10.2 48.56,40.33 ; 36.79,38.29 C1.1 35.98,39.07 ; 56.13,16.78 R15.6 56.13,18.33 ; 55.33,16.78 R15.4 55.33,18.33 ; 60.32,16.53 R13.2 59.51,17.31 ; C2.2 37.46,42.59 ; C2.2 36.31,40.99 ; C2.2 38.6,40.99 ; C2.2 37.46,39.39 ; 24.92,32.4 C25.2 24.14,31.59 ; 62.77,17.28 R16.2 61.16,17.28 ; C3.2 33.34,38.81 ; C3.2 32.2,37.21 ; C3.2 33.34,35.61 ; 57.36,15.55 C36.2 56.56,16.34 ; 44.48,39.73 C38.2 45.26,40.54 ; C4.1 31.84,41.49 ; C4.1 30.23,41.49 ; C4.1 31.03,42.27 ; 57.4,15.53 C37.2 ; C37.2 59.02,15.53 ; C37.2 58.21,16.31 ; 64.59,32.91 C34.2 63.78,33.69
  BOTTOM w0.254: v1(35.81,29.84) 35.18,29.84 34.09,30.93 C27.1
  BOTTOM w0.381: v1(35.81,29.84) 36.51,29.84 37.14,29.21 C29.2
  BOTTOM w0.508: U5.12 13.3,32.4 14.7,33.8 ; C5.2 41.74,13.95 41.38,13.59 v1(40.56,13.59) ; C25.2 v1(24.92,30.34) ; 31.03,42.57 v1(31.01,42.59) ; v1(11.76,22.61) 12.3,22.07 12.3,21.98 12.5,21.78 U5.34 ; C38.2 v1(44.48,41.52) ; C32.1 14.7,33.8 ; 14.7,33.8 v1(15.11,33.8) ; R13.2 61.94,17.31 R16.2 61.97,16.05 v1(61.72,15.8) ; 45.03,36.22 45.03,36.39 44.23,37.2 C16.2 ; v1(32.76,12.34) 32.15,12.95 C12.1 ; R15.8 R15.6 R15.4 R15.2 ; 58.18,15.55 C37.2 ; C36.2 v1(55.53,15.55) ; U1.3 v1(59.45,30.91) ; U1.7 58.95,25.83 v1(58.89,25.76) ; C11.2 47.78,34.34 C13.1 ; C34.2 v1(65.87,33.69) ; C28.2 v1(29.36,42.49) ; U7.B35 v1(34.7,3.42)
  vias: v1(17.82,36.55)
VDD18: length 117
  TOP w0.203: U2.26 40.52,19.72 41.2,20.4 41.58,20.4 42.33,21.15 42.84,21.15 43.17,21.49 U2.36 45.91,21.49 46.19,21.76 C19.1 ; U2.99 27.11,31.89 v1(26.31,32.69) ; v1(36.57,30.91) 36.57,31.57 35.32,32.82 U2.84 35.32,35.24 35.71,35.63 38.13,35.63 38.52,35.24 U2.76 ; v1(46.47,30.69) 45.48,30.69 45.48,30.69 U2.59 43.55,30.69 43.11,30.25 42.93,30.25 v1(41.15,28.47) ; C30.1 23.5,19.01 v1(22.5,20.01) 22.5,20.62 23.36,21.49 U2.125 ; U2.7 32.92,17.64 33.3,17.27 33.3,15.46 33.16,15.33 v1(33.16,14.72)
  TOP w0.254: v1(34.96,36.79) 34.96,36.03 35.53,35.45
  TOP w0.508: C22.2 37.28,36.79 C1.2 v1(34.96,36.79) 34.96,38.35 34.13,39.17 C17.1 ; v1(46.94,20.51) C19.1
  POWER w0.508: v1(46.47,30.69) 46.47,29.79 48.33,27.94 48.33,24.38 46.94,23 v1(46.94,20.51) ; v1(24.33,27.38) 22.27,25.32 22.27,20.24 v1(22.5,20.01) 27.85,14.66 32.34,14.66 32.4,14.72 v1(33.16,14.72)
  BOTTOM w0.203: v1(36.57,30.91) 35.64,30.91 C27.2 ; C25.1 26.31,31.71 v1(26.31,32.69) ; v1(41.15,28.47) 41,28.47 C29.1
  BOTTOM w0.254: C1.2 36.01,36.79 36.69,37.47 36.69,37.5 37.13,37.93 L2.1
  BOTTOM w0.381: C27.2 35.59,30.98 34.77,31.8 33.49,31.8 32.21,30.52 29.41,30.52
  BOTTOM w0.508: v1(33.16,14.72) 33.04,14.84 C12.2 ; C29.1 39.65,29.82 39.65,29.86 38.6,30.91 v1(36.57,30.91) ; C1.2 v1(34.96,36.79) 34.96,38.34 34.03,39.27 C2.1 ; 29.41,30.52 28.34,31.59 C25.1 26.42,29.47 v1(24.33,27.38)
VDD18A: length 31.2
  TOP w0.152: 43.2,31.9 43.2,31.68 43.39,31.49 U2.61
  TOP w0.203: 43.2,31.9 43.2,32.71 43.86,33.37 v1(44.93,33.37) ; U2.70 40.92,35.53
  TOP w0.381: 40.92,35.53 40.8,35.66 40.8,35.94 v1(40.3,36.43)
  TOP w0.508: 40.3,36.47 v1(40.3,36.43)
  TOP w0.762: v1(42.26,42.11) 41.88,41.73 C14.1
  BOTTOM w0.508: L2.2 38.23,37 39.73,37 v1(40.3,36.43) ; v1(40.3,36.43) 40.84,36.97 40.84,38.2 C21.2 39.47,38.64 39.21,38.9 39.21,41.22 40.1,42.11 v1(42.26,42.11) ; v1(40.3,36.43) 42.17,34.57 43.73,34.57 v1(44.93,33.37) 45.17,33.37 C13.2 46.21,32.71 C11.1
VDD33: length 298
  TOP w0.152: v1(45.74,29.73) 45.58,29.89 U2.57
  TOP w0.203: U2.24 39.72,15.37 v1(38.42,14.07) ; 26.31,20.11 25.92,19.71 25.92,17.57 24.72,16.37 R19.1 ; C8.1 31.03,37.13 31.54,36.63 31.54,36.42 32.92,35.03 U2.90 ; v1(38.75,36.19) 38.91,36.04 38.91,35.26 38.92,35.25 U2.75 ; U2.126 27.32,21.09 C7.2 ; v1(47.03,27.25) 45.59,25.81 45.59,25.81 45.27,25.49 U2.46 ; 24.71,14.45 v1(24.72,14.44)
  TOP w0.254: 26.31,20.11 26.71,20.51 C7.2
  TOP w0.508: v1(24.72,14.44) R19.1 ; R8.7 R8.5 R8.3 R8.1 v1(28.26,12.52) ; C18.2 v1(9.1,37.3) ; v1(8.15,40.26) R3.1 R3.3 ; D1.2 49.14,14.45 48.02,14.45 47.28,13.71 v1(47.28,9.54) 47.82,9 49.8,9 R5.1 ; R17.2 v1(8.93,41.6) ; v1(65.32,2.26) 65.32,1.62 65.07,1.37 U7.A72 U7.A71 ; R9.2 50.3,25.28 v1(50.89,25.88) ; U6.9 53.8,23.72 54.32,24.24 v1(54.32,24.79) ; v1(50.92,27.73) 50.32,28.33 R10.2 ; U6.28 v1(62.04,34.97) ; U3.8 5.45,31.42 v1(4.39,30.35) ; R18.2 63.81,33.89 63.14,34.56 v1(63.14,35.12) ; C26.1 v1(1.78,31.43)
  TOP w0.762: v1(47.28,9.54) 47.28,8.13 v1(47.58,7.83) ; v1(62.27,7.52) 62.27,6.63 63.14,5.76 63.67,5.76 65.32,4.11 v1(65.32,2.26) ; v1(14.51,40.52) 22.31,40.52 25.62,37.21 v1(26.94,37.21) 28.44,37.21 28.52,37.13 C8.1 31.01,38.22 C23.2 ; D1.2 49.54,14.4 50.79,15.64 v1(51.78,15.64)
  POWER w0.254: v1(47.03,27.25) 47.03,28.44 v1(45.74,29.73)
  POWER w0.508: v1(28.26,12.52) 26.81,12.52 26.68,12.65 26.51,12.65 v1(24.72,14.44) 24.18,14.97 24.18,14.98 20.14,19.02 20.14,21.66 13.86,27.94 6.04,27.94 4.39,29.59 v1(4.39,30.35) 3.31,31.43 v1(1.78,31.43) 1.78,34.41 2.8,35.43 3.73,35.43 6.37,38.07 8.32,38.07 v1(9.1,37.3) ; v1(26.94,37.21) 28.1,36.05 37.85,36.05 37.99,36.19 v1(38.75,36.19) ; v1(8.93,41.6) 8.93,41.04 v1(8.15,40.26) 9.1,39.3 v1(9.1,37.3) ; 15.07,39.96 v1(14.51,40.52) 12.33,40.52 v1(9.1,37.3) ; v1(38.75,36.19) 38.75,34.24 39.52,33.47 42.79,33.47 45.74,30.53 v1(45.74,29.73) ; v1(38.75,36.19) 40.58,38.02 40.58,39.93 41.19,40.54 v1(41.95,40.54)
  POWER w0.762: 40.58,38.05 47.95,38.05 49.97,40.06 v1(51.41,40.06) 58.81,40.06 61.42,37.46 61.42,35.6 v1(62.04,34.97) ; v1(54.02,28.7) 53.05,27.73 v1(50.92,27.73) ; v1(54.02,28.7) 54.32,28.39 v1(54.32,24.79) ; v1(54.02,28.7) 54.65,29.33 54.65,29.91 v1(57.52,32.79) 57.52,33.68 58.82,34.97 v1(62.04,34.97) ; v1(64.59,36.83) 64.59,36.57 v1(63.14,35.12) 62.2,35.12 v1(62.04,34.97) ; v1(54.32,24.79) 51.99,24.79 v1(50.89,25.88) ; v1(54.32,24.79) 54.32,23.9 54.5,23.72 54.5,22.96 51.78,20.24 v1(51.78,15.64) 53.55,17.41 58.02,17.41 62.27,13.15 v1(62.27,7.52)
  BOTTOM w0.508: R6.2 62.03,7.76 v1(62.27,7.52) ; v1(57.52,32.79) 56.86,33.45 U1.14 ; R4.1 47.28,9.35 v1(47.28,9.54) ; v1(54.02,28.7) 54.02,29.03 53.41,29.64 C35.2 ; R7.2 v1(47.58,7.83) ; C34.1 v1(64.59,36.83) ; C38.1 v1(41.95,40.54) ; L3.2 v1(14.51,40.52) ; v1(38.42,14.07) 39.24,14.88 C5.1
  BOTTOM w0.762: v1(26.94,37.21) C3.1 29.36,37.77 C28.1 31.01,39.96 C4.2 ; L1.1 v1(51.41,40.06) ; v1(47.28,9.54) 44.21,12.62 42.14,12.62 42.12,12.65 39.82,12.65 39.05,13.41 39.05,13.44 v1(38.42,14.07)
VDD33A: length 68.4
  TOP w0.203: U2.66 42.52,35.52 42.41,35.63 v1(42.41,35.94)
  TOP w0.254: v1(59.51,7.9) 60.39,7.01 60.39,3.43 60.7,3.12 U7.A68
  TOP w0.508: v1(41.93,39.67) 42.72,38.88 C9.2
  POWER w0.203: 59.2,7.79 58.25,7.79 49.75,16.29 49.75,20.02 49.4,20.38 49.4,20.86 49.62,21.09 49.62,30.93 45.53,35.02 43.33,35.02 v1(42.41,35.94)
  POWER w0.254: 59.2,7.79 59.4,7.79 v1(59.51,7.9)
  POWER w0.508: v1(46.96,41.78) 44.85,39.67 v1(41.93,39.67)
  BOTTOM w0.508: v1(41.93,39.67) 41.93,37.18 42.41,36.7 v1(42.41,35.94) 42.95,35.4 43.56,35.4 C16.1
  BOTTOM w0.762: L1.2 48.67,41.56 48.45,41.78 v1(46.96,41.78) ; v1(41.93,39.67) 43.4,38.2 44.57,38.2 44.64,38.13 45.27,38.13 46.5,36.9 C10.1
25MXTLN: length 17.3
  TOP w0.203: 46.24,31.89 U2.62
  TOP w0.508: 46.24,31.89 49.5,35.15 52.37,35.15 Y1.1
  BOTTOM w0.508: R1.2 54.18,36.97 Y1.1 54.9,37.09 C15.2
25MXTLP: length 13.1
  TOP w0.203: 46.32,33.17 46.32,33.14 45.48,32.29 U2.63
  TOP w0.508: Y1.2 46.32,34.19 46.32,33.17
  BOTTOM w0.508: C20.2 50.07,36.84 Y1.2 50.6,38.47 R1.1
2003_ENABLE: length 35
  TOP w0.152: U7.A63 56.7,4.28 v1(56.06,4.92) ; v1(32.71,16.94) 32.35,17.29 32.35,17.6 32.12,17.83 U2.5
  BOTTOM w0.152: v1(56.06,4.92) 56.06,5.88 44.77,17.17 35.73,17.17 35.5,16.94 v1(32.71,16.94)
CHSEL0: length 52.3
  TOP w0.152: v1(44.67,10.56) 44.67,7.59 44.53,7.46 44.53,7.28 44.52,7.27 44.52,4.16 45.5,3.18 U7.A49 ; U2.112 30.06,26.69 30.09,26.66 31.18,26.66 31.6,26.24 31.6,25.1 31.08,24.58 31.08,23.9 31.46,23.52 31.47,23.52 31.82,23.16 35.85,23.16 v1(39.03,26.34) 39.03,31.78 37.72,33.09 U2.78
  POWER w0.152: v1(39.03,26.34) 39.03,20.5 40.33,19.19 43.49,16.03 43.49,11.75 v1(44.67,10.56)
  BOTTOM w0.381: v1(44.67,10.56) 45.49,9.75 R4.2
CHSEL1: length 36
  TOP w0.152: v1(43.98,7.52) 43.98,4.24 44.7,3.51 U7.A48 ; v1(37.92,26.06) 37.92,26.18 37.91,26.19 37.91,31.97 36.92,32.96 U2.80
  POWER w0.152: v1(43.98,7.52) 42.87,8.62 42.87,9.38 42.82,9.42 42.82,15.75 39.66,18.91 38.25,20.35 38.25,25.01 37.92,25.34 v1(37.92,26.06)
CHSEL2: length 36.5
  TOP w0.152: v1(36.67,25.65) 36.67,26.23 36.6,26.31 36.6,27.05 37.13,27.58 37.13,31.52 36.12,32.52 U2.82 ; U7.A47 43.9,3.85 43.64,4.11 43.64,5.35 v1(43.22,5.76)
  POWER w0.152: v1(43.22,5.76) 42.21,6.78 42.21,9.1 42.16,9.15 42.16,15.48 39,18.64 37.59,20.08 37.59,24.74 v1(36.67,25.65)
CHSEL3: length 36.4
  TOP w0.152: v1(41.32,8.73) 41.32,8.12 42.67,6.78 42.67,5.53 43.1,5.1 U7.A46 ; U2.86 34.52,30.53 34.77,30.28 34.77,26.62 v1(35.4,25.98)
  POWER w0.152: v1(41.32,8.73) 41.32,15.39 36.92,19.78 36.92,23.85 35.4,25.37 v1(35.4,25.98)
DALI_READ: length 41.3
  TOP w0.152: U2.116 30.05,25.09 30.5,24.64 30.5,22.9 31.38,22.02 37.72,22.02 U2.19 37.72,17.35 37.29,16.93 37.29,15.86 36.54,15.11 36.54,11.63 35.48,10.56 29.25,10.56 23.3,4.61 U7.A26
DALI_WRITE: length 27
  TOP w0.203: U2.21 38.52,16.39 37,14.87 37,11.58 35.63,10.21 29.4,10.21 24.1,4.91 U7.A27
EXT_DATA_RD#: length 50.8
  TOP w0.152: U6.4 51.27,30.07 51.21,30.12 48.41,30.12 46.17,27.89 U2.52 42.53,27.89 42.53,27.75 v1(41.04,26.26)
  POWER w0.152: v1(9.48,18.77) 14.15,23.44 v1(14.5,23.44)
  BOTTOM w0.152: U5.37 10.1,19.37 10.08,19.37 v1(9.48,18.77) ; v1(14.5,23.44) 20.38,23.44 22.13,21.69 24.72,21.69 27.74,24.71 33.92,24.71 34.27,25.07 39.85,25.07 v1(41.04,26.26)
EXT_DATA_WR#: length 69
  TOP w0.152: v1(50.74,31.34) U6.3 56.43,31.34 v1(59.38,28.39) ; v1(43.07,20.55) 43.34,20.29 U2.33
  POWER w0.152: v1(49.98,20.62) 49.98,30.58 v1(50.74,31.34)
  BOTTOM w0.152: v1(59.38,28.39) 60.86,28.39 U1.5 ; v1(49.98,20.62) 49.31,19.95 43.68,19.95 v1(43.07,20.55) ; v1(50.74,31.34) 50.65,31.25 43.83,31.25 42.49,32.58 32.88,32.58 32.21,31.91 30.37,31.91 29.03,33.25 16.48,33.25 15.7,32.46 U5.15
EXT_RAM_CE0#: length 64.2
  TOP w0.152: v1(16.52,29.37) 19.09,31.95 21.48,31.95 v1(23.56,34.03) ; U2.58 46.08,30.29 46.24,30.13 46.71,30.13 48.48,31.9 48.48,31.92 v1(49.32,32.76)
  BOTTOM w0.152: v1(23.56,34.03) 23.98,33.62 42.39,33.62 44.1,31.91 48.46,31.91 v1(49.32,32.76) 50.56,34 57.71,34 59.53,32.18 U1.2 ; U5.8 10.1,29.38 11.03,28.44 15.59,28.44 v1(16.52,29.37)
GP1: length 40.6
  TOP w0.152: v1(31.64,24.13) 32.15,24.63 32.15,26.15 32.33,26.32 32.33,28.5 31.46,29.36 31.46,31.34 30.83,31.97 30.83,33.28 30.92,33.37 U2.95
  POWER w0.152: v1(31.64,24.13) 31.64,23.52 31.85,23.31 31.85,22.1 28.67,18.92 28.67,18.01 27.85,17.19 v1(26.61,17.19)
  BOTTOM w0.152: U7.B18 17.3,7.88 v1(26.61,17.19)
GP2: length 37.1
  TOP w0.152: v1(30.46,4.63) 30.46,8.8 30.42,8.84 v1(30.42,9.42) ; v1(32.43,23.72) 32.43,24.3 32.48,24.36 32.48,26.01 32.66,26.19 32.66,28.64 31.79,29.51 31.79,31.48 31.16,32.11 31.16,33.15 31.32,33.31 U2.94
  POWER w0.152: v1(32.43,23.72) 32.43,23.14 32.28,22.98 32.28,21.79 29.13,18.64 29.13,16.35 v1(28.36,15.59)
  BOTTOM w0.152: U7.B32 32.3,2.83 31.78,3.35 31.77,3.35 30.9,4.22 30.87,4.22 v1(30.46,4.63) ; v1(28.36,15.59) 29.13,14.83 29.13,10.39 29.43,10.08 29.76,10.08 v1(30.42,9.42)
GP3: length 34.8
  TOP w0.152: U2.91 32.52,33.16 32.94,32.74 32.94,29.31 33.04,29.2 v1(33.04,25.78)
  POWER w0.152: v1(33.04,25.78) 34.03,24.79 34.03,15.64 36.36,13.31 36.36,6.34 v1(35.56,5.54)
  BOTTOM w0.152: U7.B36 35.5,4.76 35.56,4.82 v1(35.56,5.54)
GP4: length 34.3
  TOP w0.152: U2.87 34.12,30.46 34.44,30.14 34.44,26.66 v1(34.12,26.35)
  POWER w0.152: v1(34.12,26.35) 34.12,25.16 34.36,24.92 34.36,15.81 36.69,13.47 36.69,5.61 v1(36.32,5.23)
  BOTTOM w0.152: v1(36.32,5.23) 36.32,4.64 36.3,4.63 U7.B37
GP5: length 36.3
  TOP w0.152: U2.85 34.92,31.03 35.1,30.86 35.1,27.48 v1(35.96,26.62)
  POWER w0.152: v1(40.45,6.45) 41.88,7.88 41.88,8.97 41.83,9.01 41.83,15.34 38.67,18.5 37.25,19.94 37.25,24.28 35.96,25.57 v1(35.96,26.62)
  BOTTOM w0.152: v1(40.45,6.45) 40.45,5.86 40.3,5.72 U7.B42
GP6: length 36.1
  TOP w0.152: v1(37.16,26.82) 37.46,27.12 37.46,31.92 36.52,32.86 U2.81
  POWER w0.152: v1(37.16,26.82) 37.16,26.23 37.36,26.03 37.36,25.43 37.92,24.87 37.92,20.21 39.33,18.78 42.49,15.61 42.49,9.28 42.54,9.24 42.54,8.39 42.86,8.07 v1(42.86,7.49)
  BOTTOM w0.152: U7.B44 41.9,6.55 41.91,6.55 v1(42.86,7.49)
GP7: length 35.6
  TOP w0.152: U2.79 37.32,33.03 38.47,31.88 v1(38.47,26.97)
  POWER w0.152: v1(38.47,26.97) 38.47,26.39 38.47,26.38 38.47,25.25 38.58,25.15 38.58,20.49 40,19.05 43.16,15.89 43.16,9.92 43.43,9.65 v1(43.43,9.06)
  BOTTOM w0.152: v1(43.43,9.06) 43.43,8.48 43.42,8.47 43.42,7.28 43.78,6.92 43.78,4.13 43.5,3.85 U7.B46
GP8: length 38.5
  TOP w0.152: U2.77 38.12,33.16 39.44,31.84 39.44,26.72 39.59,26.57 v1(39.59,25.71)
  POWER w0.152: v1(39.59,25.71) 39.59,25.13 39.39,24.93 39.39,20.69 43.82,16.27 43.82,14.6 51.1,7.31 v1(51.1,6.43)
  BOTTOM w0.152: v1(51.1,6.43) 51.1,3.98 50.7,3.59 U7.B55
GP9: length 46
  TOP w0.152: v1(33.88,27.91) 33.88,28.98 34.05,29.16 34.05,30.06 33.72,30.39 U2.88
  POWER w0.152: v1(53.66,3.53) 53.66,4.62 52.7,5.58 52.7,7.11 45.26,14.56 45.26,16.23 43.66,17.83 43.66,21.47 43.65,21.47 43.65,25.74 42.53,26.87 40.3,26.87 38.98,28.19 34.74,28.19 34.46,27.91 v1(33.88,27.91)
  BOTTOM w0.152: U7.B59 53.9,3.27 53.66,3.51 v1(53.66,3.53)
GP10: length 51
  TOP w0.152: v1(33.5,29.54) 33.5,30.12 33.32,30.3 U2.89
  POWER w0.152: v1(59.4,4.64) 58.84,4.09 55.87,4.09 54.12,5.84 54.12,7.11 52.93,8.34 52.67,8.61 46.88,14.4 46.25,15.09 46.25,16.64 44.65,18.24 44.65,26.15 42.94,27.86 40.71,27.86 39.28,29.28 34.33,29.28 34.08,29.54 v1(33.5,29.54)
  BOTTOM w0.152: v1(59.4,4.64) 59.4,2.93 59.5,2.83 U7.B66
GP11: length 54
  TOP w0.152: U2.92 32.12,33.09 32.35,32.86 v1(32.35,29.74)
  POWER w0.152: v1(61.08,4.39) 60.45,4.39 59.82,3.76 55.73,3.76 53.79,5.7 53.79,6.96 45.92,14.83 45.92,16.51 44.32,18.11 44.32,26.01 42.8,27.53 40.57,27.53 39.15,28.95 33.14,28.95 v1(32.35,29.74)
  BOTTOM w0.152: v1(61.08,4.39) 60.72,4.03 60.72,3.2 61.1,2.83 U7.B68
GP12: length 65.8
  TOP w0.152: v1(63.5,7.24) 64.59,8.32 v1(64.59,25.12) ; U2.93 v1(31.72,32.47)
  BOTTOM w0.152: v1(64.59,25.12) 62.6,27.1 U1.6 59.43,27.1 57.61,25.27 54.6,25.27 52.49,27.38 52.49,30.38 50.97,31.9 48.92,31.9 48.6,31.58 43.96,31.58 42.63,32.91 32.16,32.91 v1(31.72,32.47)
  BOTTOM w0.508: U7.B71 63.5,3.51 63.57,3.58 63.57,4.19 63.5,4.26 v1(63.5,7.24)
GP13: length 41.1
  TOP w0.152: U2.14 35.72,19.7 36.06,20.04 36.35,20.04 v1(36.37,20.05)
  BOTTOM w0.152: v1(36.37,20.05) 37.7,18.72 46.32,18.72 55.51,9.52 62.6,9.52 64.3,7.83 U7.B72
GP15: length 27.6
  TOP w0.152: U7.A51 47.1,5.85 47.26,6.02 v1(47.26,6.6) ; U2.9 33.72,13.91 v1(33.27,13.46)
  BOTTOM w0.152: v1(33.27,13.46) 34.79,13.46 36.24,12.01 41.85,12.01 v1(47.26,6.6)
GP16: length 26
  TOP w0.152: U2.12 34.92,13.7 34.69,13.47 v1(34.69,12.6) ; v1(46.48,5.94) 46.48,4.43 46.3,4.24 U7.A50
  BOTTOM w0.152: v1(46.48,5.94) 46.48,6.8 41.68,11.6 35.68,11.6 v1(34.69,12.6)
GP23: length 66.1
  TOP w0.152: v1(42.44,20.05) 41.35,20.05 40.92,19.62 U2.27 40.92,15.44 39.62,14.14 v1(39.62,10.31) ; v1(34.03,11.33) 33.62,10.91 29.13,10.91 22.5,4.28 U7.A25 ; U6.1 51.2,33.88 50.03,32.71 50.03,31.03 50.41,30.65 53.26,30.65 54.88,29.03 54.88,21.49 v1(53.82,20.42)
  BOTTOM w0.152: v1(39.62,10.31) 35.05,10.31 v1(34.03,11.33) ; v1(42.44,20.05) 42.87,19.62 53.01,19.62 v1(53.82,20.42)
GP24: length 27.5
  TOP w0.152: v1(35.95,16.59) 36.41,17.05 36.41,17.12 36.92,17.63 U2.17
  BOTTOM w0.152: v1(35.95,16.59) 35.95,16.39 36.62,15.72 38.54,15.72 38.77,15.94 42.43,15.94 49.74,8.63 49.74,5.64 49.1,5 U7.B53
H_I2C_CLOCK: length 68.1
  TOP w0.152: 7.26,33.96 8.15,34.85 R3.2 ; 7.26,33.96 8.5,32.71 8.5,26.64 ; 7.26,33.96 U3.6 ; v1(11.91,26.29) 11.75,26.29 11.49,26.54 8.6,26.54 8.5,26.64 ; 8.5,26.64 8.5,25.65 9.46,24.69 U4.6 ; v1(31.04,26.01) 30.95,26.01 30.67,26.29 U2.113 27.3,26.29 27.02,26.57 18.28,26.57 v1(18.01,26.29)
  POWER w0.152: v1(35.58,6.47) 36.03,6.92 36.03,13.17 33.7,15.51 33.7,23.71 31.4,26.01 v1(31.04,26.01)
  BOTTOM w0.152: U7.B39 37.9,5.12 36.55,6.47 v1(35.58,6.47) ; v1(18.01,26.29) 12.55,26.29 12.55,26.29 v1(11.91,26.29)
H_I2C_DATA: length 72.3
  TOP w0.152: R3.4 7.35,36.12 6.45,35.23 U3.5 4.85,35.23 4.72,35.09 4.72,32.41 5.02,32.11 6.77,32.11 7.87,31.01 7.87,24.84 9.29,23.42 U4.5 11.67,23.42 11.88,23.62 v1(11.88,25.45) ; v1(30.6,25.33) 30.33,25.6 30.33,25.89 U2.114 27.12,25.89 26.77,26.23 19.45,26.23 v1(18.48,25.27)
  POWER w0.152: v1(30.6,25.33) 31.61,25.33 33.34,23.6 33.34,15.39 35.25,13.49 v1(35.25,7.31)
  BOTTOM w0.152: v1(18.48,25.27) 18.31,25.45 v1(11.88,25.45) ; v1(35.25,7.31) 36.72,7.31 39.5,4.53 U7.B41
KEYPAD_3: length 23
  TOP w0.203: U2.22 38.92,16.25 37.46,14.79 37.46,11.38 35.91,9.83 31.86,9.83 31.1,9.06 U7.A31
LE: length 35.6
  TOP w0.152: v1(64.59,26.64) 63.92,25.98 63.92,14.2 v1(55.24,5.51)
  BOTTOM w0.152: v1(55.24,5.51) 55.24,4.49 56.3,3.43 U7.B62 ; v1(64.59,26.64) 64.59,28.52 63.47,29.64 U1.4
NRESET: length 51.5
  TOP w0.152: v1(54.68,6.4) 53.76,6.4 52.72,7.44 52.72,13.13 v1(53.64,14.04) ; U2.120 30.05,23.49 30.05,22.88 31.81,21.13 v1(35.95,21.13)
  TOP w0.381: 52.72,7.82 52.32,7.41 C24.2 R5.2 51.34,10.65 50.59,11.4 D1.1
  BOTTOM w0.152: v1(35.95,21.13) 39.36,21.13 41.34,19.15 49.22,19.15 51.38,16.99 51.86,16.99 53.64,15.21 v1(53.64,14.04) ; v1(54.68,6.4) 54.68,4.43 55.5,3.61 U7.B61
PORT0_3: length 22.4
  TOP w0.203: U2.23 39.32,16.11 37.84,14.63 37.84,11.22 36.07,9.45 32.82,9.45 31.9,8.53 U7.A32
PORT0_4: length 29.6
  TOP w0.203: U2.25 40.12,15.16 39.03,14.07 39.03,11.78 36.32,9.06 33.34,9.06 v1(32.52,8.25)
  BOTTOM w0.152: v1(32.52,8.25) 31.35,7.08 26.35,7.08 22.1,2.83 U7.B24
PORT0_5: length 31
  TOP w0.203: v1(33.8,6.52) 33.8,7.18 35.17,8.56 39.11,8.56 40.2,9.65 40.2,13.12 39.97,13.34 39.97,13.99 41.32,15.34 U2.28
  BOTTOM w0.152: v1(33.8,6.52) 33.39,6.11 26.98,6.11 23.7,2.83 U7.B26
PORT0_6: length 36.6
  TOP w0.152: U2.34 45.31,20.69 45.43,20.57 45.43,15.84 40.56,10.97 40.56,9.29 39.07,7.8 38.81,7.8 v1(38.4,7.39)
  BOTTOM w0.152: U7.B25 22.9,2.91 26.56,6.58 32.1,6.58 33.47,7.95 37.84,7.95 v1(38.4,7.39)
PORT0_7: length 23.6
  TOP w0.152: U7.A45 42.3,6.38 40.76,7.92 40.76,9.03 40.89,9.16 40.89,10.74 45.76,15.61 45.76,20.78 45.45,21.09 U2.35
PWM1: length 32.2
  TOP w0.152: v1(15.74,6.47) 18.87,9.6 26.71,9.6 28.82,11.71 32.91,11.71 34.13,12.92 34.13,15.31 34.52,15.7 U2.11
  BOTTOM w0.152: U7.B16 15.7,2.83 15.74,2.87 v1(15.74,6.47)
PWM2: length 26.2
  TOP w0.152: U7.A24 21.7,4.1 28.97,11.38 33.05,11.38 33.71,12.04 34.92,12.04 35.25,12.36 35.25,13.56 35.32,13.63 U2.13
RTCVCC: length 59.7
  TOP w0.203: U4.8 10.44,27.1 v1(9.16,27.1)
  POWER w0.203: v1(9.16,27.1) 8.89,26.83 8.89,18.53 14.09,13.33 24.33,13.33 25.55,12.11 26.46,12.11 27.1,11.48 27.1,11.4 31.76,6.74 33.65,4.86 33.93,4.57 49.07,4.57 v1(49.68,3.96)
  BOTTOM w0.203: v1(49.68,3.96) 49.68,3.35 49.9,3.12 U7.B54
RXIN: length 41.3
  TOP w0.203: v1(58.8,6.09) 58.8,3.71 59.1,3.41 U7.A66 ; U2.69 41.32,32.99 41.32,32.99 41.32,31.72 41.47,31.57 v1(41.47,30.96)
  POWER w0.203: v1(41.47,30.96) 41.47,30.83 42.71,29.59 42.83,29.59 45.79,26.62 45.79,18.72 47.39,17.12 47.59,16.91 47.59,15.52 53.77,9.34 53.77,9.34 56.53,6.57 58.31,6.57 v1(58.8,6.09)
RXIP: length 41.9
  TOP w0.203: v1(59.56,6.55) 59.56,5.94 59.99,5.51 59.99,3.69 59.9,3.6 U7.A67 ; v1(42.18,31.49) 41.72,31.95 41.72,32.99 41.72,32.99 U2.68
  POWER w0.203: v1(42.18,31.49) 42.18,30.69 42.88,29.99 42.99,29.99 46.2,26.79 46.2,18.89 47.8,17.28 48,17.08 48,15.68 53.94,9.74 56.7,6.98 59.12,6.98 v1(59.56,6.55)
SPI_CLK: length 43.9
  TOP w0.152: R8.2 29.03,15.38 29.79,16.14 v1(29.79,17.34)
  TOP w0.203: v1(29.79,17.34) 29.79,18.46 30.12,18.79 U2.1
  BOTTOM w0.203: U7.B65 58.7,4.58 58.21,5.07 58.21,5.91 45.94,18.18 30.63,18.18 v1(29.79,17.34)
SPI_DAT1: length 5.8
  BOTTOM w0.381: R7.1 48.66,6.33 46.7,4.37 U7.B50
SPI_DAT2: length 5.2
  BOTTOM w0.254: R6.1 61.23,5.48 61.9,4.81 U7.B69
SPI_MISO: length 40.9
  TOP w0.152: R8.6 30.63,15.44 31.4,16.21 v1(31.4,17.22) 31.32,17.3 U2.3
  BOTTOM w0.152: U7.B64 57.9,4.88 57.86,4.92 57.86,5.76 45.79,17.83 32,17.83 v1(31.4,17.22)
SPI_MOSI: length 41
  TOP w0.152: R8.4 29.83,15.26 30.57,16 v1(30.57,17.13) 30.57,17.16 30.92,17.51 U2.2
  BOTTOM w0.152: U7.B63 57.1,3.34 56.69,3.76 56.69,5.72 44.9,17.5 32.48,17.5 31.65,16.66 31.03,16.66 v1(30.57,17.13)
SPI_SS0: length 55.6
  TOP w0.152: v1(26.22,11.53) R19.2 26.22,15.62 30.05,19.45 30.05,20.69 U2.127
  POWER w0.152: v1(62.83,3.88) 61.92,2.97 49.87,2.97 48.79,4.06 32.46,4.06 26.22,10.3 v1(26.22,11.53)
  BOTTOM w0.152: v1(62.83,3.88) 62.83,3.3 62.7,3.17 U7.B70
SPI_SS1: length 33.2
  TOP w0.152: U2.4 31.72,17.69 31.96,17.45 31.96,16.9 32.19,16.67 v1(32.19,16.31) 31.43,15.55 R8.8
  BOTTOM w0.152: v1(32.19,16.31) 35.18,16.31 36.1,15.39 38.68,15.39 38.9,15.61 42.29,15.61 49.41,8.49 49.41,5.78 48.3,4.67 48.3,4.67 U7.B52
SYS_CLK_SEL0: length 4.8
  TOP w0.203: U2.42 46.55,23.89 46.64,23.81 R12.1 48.34,23.81 48.36,23.78 R9.1
SYS_CLK_SEL1: length 6.3
  TOP w0.203: U2.50 45.83,27.09 46.27,27.53 46.32,27.53 46.65,27.86 47.38,27.86 47.59,27.65 47.62,27.65 48.19,27.09 48.19,26.88 ; 48.19,26.88 R11.1 ; 48.19,26.88 49,26.88 49.05,26.83 R10.1
TXON: length 40.3
  TOP w0.203: U7.A64 57.5,3.81 57.27,4.04 v1(57.27,4.64) ; U2.72 40.12,34.18 40.12,32.13 40,32.01 v1(40,30.91)
  POWER w0.203: v1(40,30.91) 42.11,28.8 42.5,28.8 45,26.3 45,18.39 46.6,16.79 46.6,15.39 54.95,7.04 56.52,5.42 56.52,5.4 v1(57.27,4.64)
TXOP: length 40.6
  TOP w0.203: v1(40.58,31.57) 40.58,32.18 40.54,32.22 40.54,33.79 U2.71 ; U7.A65 58.3,4.53 v1(57.27,5.56)
  POWER w0.203: v1(40.58,31.57) 40.58,30.9 42.27,29.21 42.67,29.21 45.41,26.47 45.41,18.56 47.01,16.96 47.01,15.56 56.58,5.99 56.84,5.99 v1(57.27,5.56)
UART0_RXD: length 59.3
  TOP w0.152: U2.98 30.05,32.29 30.05,31.97 v1(30.82,31.2) ; U7.A70 62.3,2.88 62.27,2.9 62.27,4.37 v1(62.6,4.7)
  POWER w0.152: v1(49.04,30.69) 49.04,30.1 49.27,29.87 49.27,21.24 49.04,21.01 49.04,20.14 49,20.08 48.98,20.02 48.97,19.97 48.97,15.22 54.09,10.1 54.09,10.1 56.85,7.34 59.96,7.34 v1(62.6,4.7)
  BOTTOM w0.152: v1(49.04,30.69) 47.3,30.69 46.74,30.13 46.24,30.13 46.07,30.3 44.24,30.3 42.29,32.25 33.02,32.25 31.97,31.2 v1(30.82,31.2)
UART0_TXD: length 44
  TOP w0.152: v1(31.77,28.06) 30.27,29.56 30.27,30.12 30.1,30.29 U2.103
  POWER w0.152: v1(52.37,3.96) 52.37,6.98 44.93,14.42 44.93,16.09 40.05,20.97 40.05,24.37 40.48,24.79 40.48,26.22 38.84,27.86 34.91,27.86 34.82,27.77 34.78,27.73 34.39,27.35 32.48,27.35 v1(31.77,28.06)
  BOTTOM w0.152: v1(52.37,3.96) 52.37,3.37 52.3,3.31 U7.B57
UART1_RXD: length 42.6
  TOP w0.152: U2.107 30.05,28.69 30.05,28.68 v1(31.37,27.35)
  POWER w0.152: v1(51.78,4.77) 51.78,7.09 44.42,14.46 44.42,16.14 39.72,20.83 39.72,24.5 40.15,24.93 40.15,26.08 38.7,27.53 35.05,27.53 34.94,27.43 34.54,27.02 31.7,27.02 v1(31.37,27.35)
  BOTTOM w0.152: U7.B56 51.5,3.9 51.78,4.19 v1(51.78,4.77)
UART1_TXD: length 52.2
  TOP w0.152: v1(61.28,3.6) 61.5,3.39 U7.A69 ; v1(30.32,27.22) 30.05,27.49 U2.110
  POWER w0.152: v1(61.28,3.6) 61.11,3.43 55.6,3.43 53.36,5.66 53.36,6.92 45.59,14.69 45.59,16.37 43.99,17.97 43.99,21.6 43.98,21.61 43.98,25.88 42.66,27.2 40.43,27.2 39.01,28.62 31.54,28.62 30.32,27.41 v1(30.32,27.22)
UART2_RXD: length 29.2
  TOP w0.152: U2.18 37.32,17.56 36.74,16.98 v1(36.74,16.39)
  BOTTOM w0.152: U7.B58 53.1,7.9 44.73,16.27 38.63,16.27 38.41,16.05 37.66,16.05 37.32,16.39 v1(36.74,16.39)
UART2_TXD: length 28.5
  TOP w0.152: v1(37.92,16.61) 38.12,16.81 U2.20
  BOTTOM w0.152: v1(37.92,16.61) 44.86,16.61 53.43,8.03 53.43,5.2 54.7,3.94 U7.B60
USB_A0: length 54.2
  TOP w0.152: U6.8 51.87,24.99 49.79,22.91 46.47,22.91 45.45,21.89 U2.37 43.07,21.89 42.69,21.51 42.19,21.51 41.44,20.76 41.05,20.76 40.98,20.69 40.08,20.69 38.22,22.55 31.65,22.55 v1(31.24,22.96)
  POWER w0.152: v1(31.24,22.96) 25.17,29.02 19.18,29.02 18.6,28.44 8.96,28.44 8.96,28.45 7.26,28.45 6.5,29.2 v1(6.09,29.61)
  BOTTOM w0.152: v1(6.09,29.61) 6.09,30.2 6.1,30.2 U5.3
USB_CS: length 5.5
  TOP w0.381: U6.27 59.99,32.61 v1(59,33.6)
  BOTTOM w0.381: v1(59,33.6) 59.3,33.3 60.73,33.3 U1.1
USB_D+: length 25.2
  TOP w0.203: v1(45.08,7.05) 45.08,7.66 45.26,7.84 45.26,14.61 50.67,20.02 50.67,21.88 51.24,22.45 U6.10
  BOTTOM w0.203: v1(45.08,7.05) 45.9,6.23 U7.B49
USB_D-: length 23.2
  TOP w0.203: v1(45.08,6.09) 45.66,6.68 45.66,14.44 51.07,19.85 51.07,20.38 51.87,21.18 U6.11
  BOTTOM w0.203: v1(45.08,6.09) 45.08,5.48 45.1,5.46 U7.B48
USB_LED: length 2.8
  TOP w0.508: U6.24 64.23,28.8 D2.2
USB_RSTI: length 3.1
  TOP w0.254: U6.2 v1(53.92,32.61)
  BOTTOM w0.254: C35.1 53.41,32.1 v1(53.92,32.61)
USB_XI: length 13.3
  TOP w0.508: X1.1 60.01,13.78 55.15,18.64 U6.13
  BOTTOM w0.508: C37.1 58.48,14.03 X1.1
USB_XO: length 8.5
  TOP w0.508: U6.14 53.02,17.37 54.7,15.69 54.7,14 54.93,13.78 X1.2
  BOTTOM w0.508: C36.1 56.49,14.05 X1.2
XADDR1: length 26.7
  TOP w0.152: U2.124 23.82,21.89 v1(23.06,22.65)
  BOTTOM w0.152: v1(23.06,22.65) 22.47,22.65 18.03,27.1 10.4,27.1 6.9,30.6 U5.4
XADDR2: length 25.8
  TOP w0.152: U2.123 24.84,22.29 24.55,22.58 v1(23.97,22.58)
  BOTTOM w0.152: v1(23.97,22.58) 23.13,23.42 22.19,23.42 18.18,27.43 10.61,27.43 7.7,30.34 U5.5
XADDR3: length 25.1
  TOP w0.152: v1(24.73,23.24) 25.28,22.69 U2.122
  BOTTOM w0.152: v1(24.73,23.24) 23.92,23.24 23.36,23.8 22.27,23.8 18.31,27.76 10.74,27.76 8.5,30.01 U5.6
XADDR4: length 24.3
  TOP w0.152: U2.121 25.8,23.09 24.99,23.89 24.81,23.89 24.8,23.9 v1(24.17,23.9)
  BOTTOM w0.152: U5.7 9.3,29.71 10.92,28.09 18.45,28.09 22.41,24.13 23.95,24.13 v1(24.17,23.9)
XADDR5: length 16.3
  TOP w0.152: v1(25.04,24.45) 25.6,23.89 U2.119
  BOTTOM w0.152: U5.16 16.5,30.51 22.55,24.46 24.45,24.46 24.45,24.45 v1(25.04,24.45)
XADDR6: length 15.5
  TOP w0.152: v1(23.16,25.04) 25.52,25.04 26.27,24.29 U2.118
  BOTTOM w0.152: v1(23.16,25.04) 22.43,25.04 17.3,30.18 U5.17
XADDR7: length 14.5
  TOP w0.152: v1(24.25,25.68) 25.57,25.68 26.56,24.69 U2.117
  BOTTOM w0.152: v1(24.25,25.68) 22.7,25.68 18.1,30.28 U5.18
XADDR8: length 13.1
  TOP w0.152: v1(22.65,27.26) 23.33,27.94 27.94,27.94 27.99,27.89 U2.109
  BOTTOM w0.152: U5.19 18.9,29.95 21.58,27.26 v1(22.65,27.26)
XADDR9: length 12
  TOP w0.152: v1(22.11,28.06) 22.33,28.29 U2.108
  BOTTOM w0.152: v1(22.11,28.06) 21.25,28.06 19.7,29.61 U5.20
XADDR10: length 32.6
  TOP w0.152: U2.54 45.42,28.69 45.66,28.45 v1(45.68,28.45)
  BOTTOM w0.152: v1(45.68,28.45) 43.68,26.45 42.48,26.45 40.44,24.41 34.56,24.41 32.2,22.04 26.4,22.04 23.58,19.22 19.32,19.22 18.9,19.64 U5.26
XADDR11: length 19.7
  TOP w0.152: v1(18.58,21.54) 18.58,22.29 17.45,23.43 17.45,26.52 20.01,29.09 U2.106
  BOTTOM w0.152: U5.27 18.1,21.05 v1(18.58,21.54)
XADDR12: length 20
  TOP w0.152: U2.105 25.33,29.49 25.29,29.45 19.91,29.45 17.12,26.66 17.12,23.29 17.7,22.71 v1(17.7,21.59)
  BOTTOM w0.152: v1(17.7,21.59) 17.7,21.46 17.3,21.06 U5.28
XADDR13: length 20.4
  TOP w0.152: U2.104 25.27,29.89 25.15,29.78 19.77,29.78 16.79,26.79 16.79,23.16 16.88,23.06 v1(16.88,21.61)
  BOTTOM w0.152: v1(16.88,21.61) 16.88,21.51 16.48,21.1 16.48,20.15 U5.29
XADDR14: length 21.4
  TOP w0.152: U2.102 25.36,30.69 25.15,30.9 20.42,30.9 16.46,26.93 16.46,22.56 16.05,22.15 v1(16.05,21.56)
  BOTTOM w0.152: v1(16.05,21.56) 15.8,21.32 15.8,20.24 U5.30
XADDR15: length 30.4
  TOP w0.152: U2.101 25.43,31.09 25.29,31.23 20.28,31.23 15.97,26.91 15.97,22.54 15.72,22.28 15.72,22.04 v1(15.21,21.53)
  BOTTOM w0.152: U5.38 9.3,22.89 10.05,23.64 12.51,23.64 14.62,21.53 v1(15.21,21.53)
XADDR16: length 30.6
  TOP w0.152: v1(15.13,22.34) 15.64,22.85 15.64,27.05 20.15,31.56 26.94,31.56 27,31.49 U2.100
  BOTTOM w0.152: U5.39 8.5,22.75 9.72,23.97 12.71,23.97 14.34,22.34 v1(15.13,22.34)
XADDR17: length 47.2
  TOP w0.152: U2.60 43.33,31.09 43.07,30.83 v1(42.87,30.83)
  BOTTOM w0.152: v1(42.87,30.83) 42.87,27.3 40.31,24.74 34.41,24.74 32.07,22.4 25.9,22.4 24.85,21.36 21.84,21.36 20.29,22.9 14.75,22.9 14.73,22.88 14.26,22.88 12.84,24.3 9.42,24.3 7.7,22.58 U5.40
XADDR18: length 28.1
  TOP w0.152: v1(27.02,25.25) 27.6,25.25 27.84,25.49 U2.115
  BOTTOM w0.152: U5.41 6.9,22.32 9.21,24.63 19.65,24.63 22.27,22.02 24.38,22.02 27.02,24.66 v1(27.02,25.25)
XDATA0: length 87.8
  TOP w0.152: v1(11.73,29) 12.46,28.27 12.46,19.25 12.74,18.97 12.74,17.49 13.91,16.32 14.45,16.32 14.51,16.38 v1(14.95,16.38) ; U2.39 43.01,22.69 v1(43,22.7) ; v1(58.81,19.86) 58.81,19.28 60.72,17.37 U6.15
  BOTTOM w0.152: v1(11.73,29) 10.9,29.84 U5.9 ; R14.1 58.57,19.59 58.81,19.84 v1(58.81,19.86) 58.81,20.61 56.97,22.45 43.83,22.45 43.58,22.7 v1(43,22.7) 35.2,22.7 32.74,20.24 27.07,20.24 23.63,16.79 15.37,16.79 v1(14.95,16.38) 14.95,2.88 14.9,2.83 U7.B15
XDATA1: length 88.6
  TOP w0.152: U6.16 60.57,18.64 59.51,19.71 v1(59.51,20.29) ; v1(14.22,16.88) 13.82,16.88 13.07,17.63 13.07,19.11 12.79,19.39 12.79,28.8 12.59,29 v1(12.59,29.59) ; U2.41 v1(42.56,23.49)
  BOTTOM w0.152: R13.1 60.32,19.48 v1(59.51,20.29) 59.51,20.55 57.14,22.91 44.79,22.91 44.21,23.49 v1(42.56,23.49) 42.13,23.06 35.09,23.06 32.6,20.57 26.9,20.57 23.63,17.3 14.63,17.3 v1(14.22,16.88) 14.22,16.3 14.1,16.18 U7.B14 ; U5.10 11.7,29.9 12.01,29.59 v1(12.59,29.59)
XDATA2: length 92.4
  TOP w0.152: v1(14.09,29.61) 14.09,28.66 13.94,28.51 13.94,18.6 13.86,18.52 v1(13.86,17.63) ; v1(54.65,20.44) 54.92,20.17 58.14,20.17 58.82,20.85 59.96,20.85 v1(60.5,20.32) 60.9,19.91 U6.17 ; U2.43 v1(42.91,24.29)
  BOTTOM w0.152: v1(14.09,29.61) 14.09,30.59 14.1,30.6 U5.13 ; U7.B13 13.3,17.07 v1(13.86,17.63) 23.46,17.63 26.75,20.93 32.49,20.93 34.98,23.42 41.45,23.42 42.32,24.29 v1(42.91,24.29) 43.91,24.29 44.94,23.26 57.32,23.26 59.73,20.85 59.96,20.85 v1(60.5,20.32) ; R15.1 54.53,20.32 v1(54.65,20.44)
XDATA3: length 88.6
  TOP w0.152: v1(14.43,18.21) 14.43,22.51 15.06,23.14 15.06,29.49 v1(14.93,29.61) ; U2.45 43.05,25.09 v1(43.05,25.09) ; U6.18 60.67,21.18 v1(60.42,21.43)
  BOTTOM w0.152: R16.1 61.97,19.88 v1(60.42,21.43) 59.73,21.43 57.5,23.67 45.03,23.67 43.61,25.09 v1(43.05,25.09) 42.46,25.09 41.12,23.75 34.84,23.75 32.38,21.28 26.61,21.28 23.54,18.21 v1(14.43,18.21) 13.54,18.21 12.5,17.17 U7.B12 ; U5.14 14.9,30.6 14.93,30.57 v1(14.93,29.61)
XDATA4: length 108.8
  TOP w0.152: U2.47 v1(42.72,25.89) ; U6.19 v1(60.47,22.45) 59.56,22.45 v1(57.84,20.73)
  POWER w0.152: J1.1 1.69,36.62 1.69,36.54 0.93,35.79 0.93,31.37 3.85,28.44 3.88,28.44 5.53,26.79 7.49,26.79 8.17,26.11 8.17,17.29 10.98,14.48 11.05,14.48 v1(11.46,14.07)
  BOTTOM w0.152: v1(57.84,20.73) 57.19,20.08 56.93,20.08 R15.7 ; v1(60.47,22.45) 59.25,22.45 57.68,24.03 45.36,24.03 43.49,25.89 v1(42.72,25.89) 40.9,24.08 34.7,24.08 32.31,21.69 26.51,21.69 23.67,18.84 15.25,18.84 14.9,19.2 ; 14.9,19.2 U5.31 ; 14.9,19.2 14.51,18.81 13.67,18.81 11.46,16.6 v1(11.46,14.07) 11.46,6.11 11.7,5.86 U7.B11
